# EAGLE board Board (EAGLE 9.6.2)
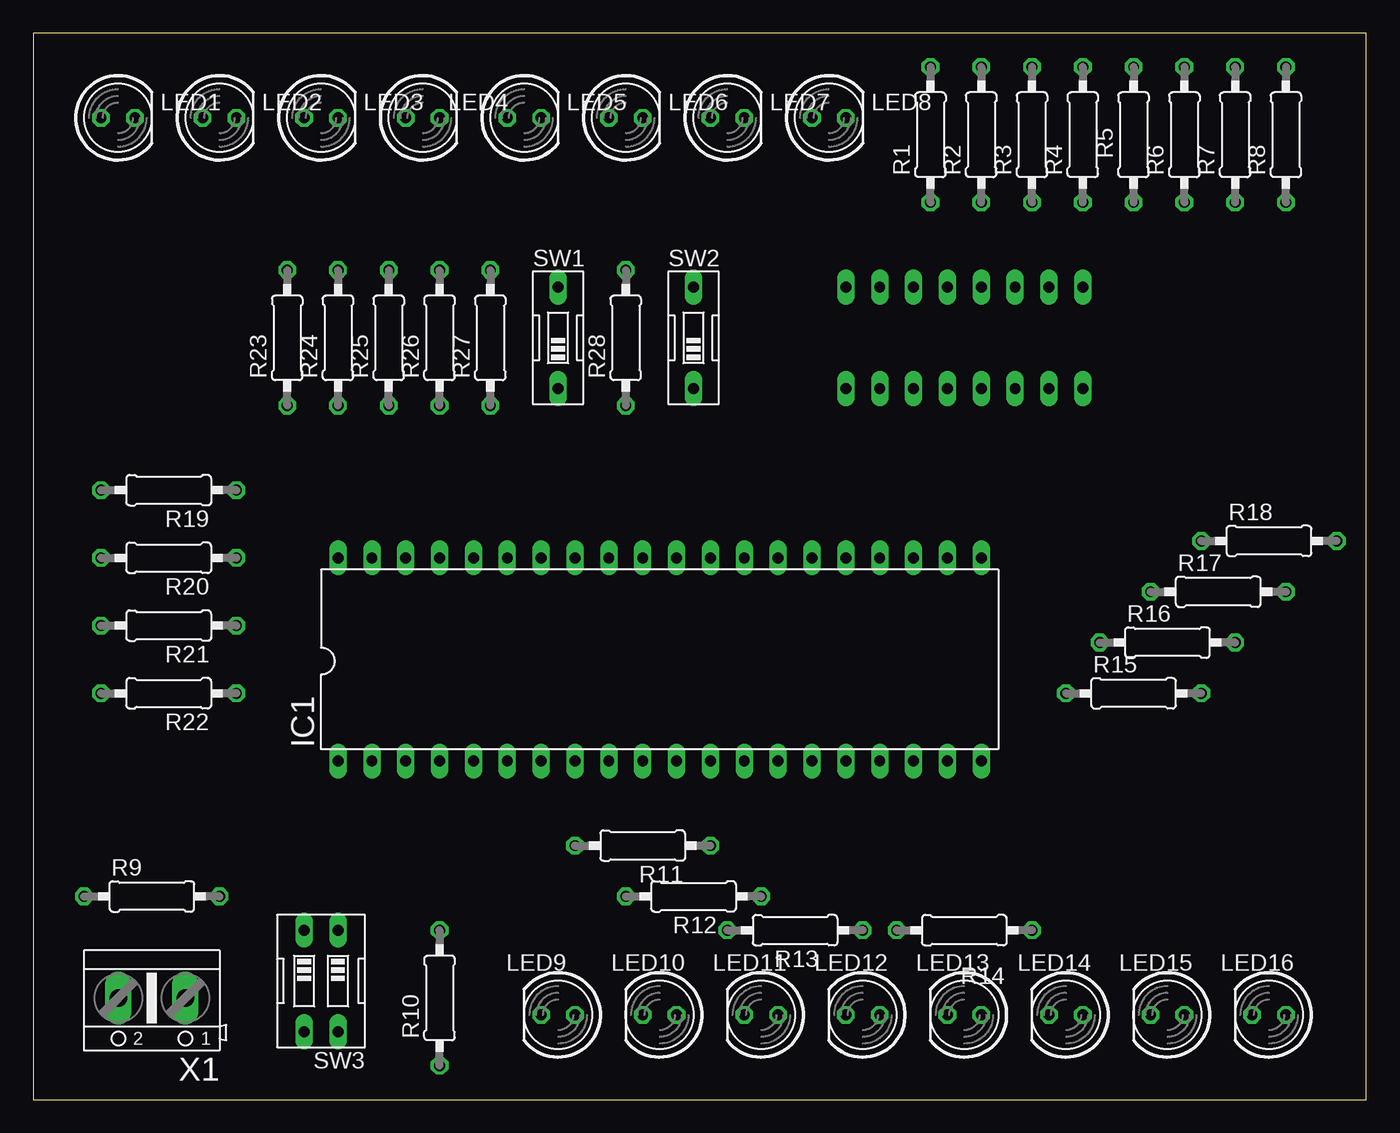
[diagram p0: board, top side]
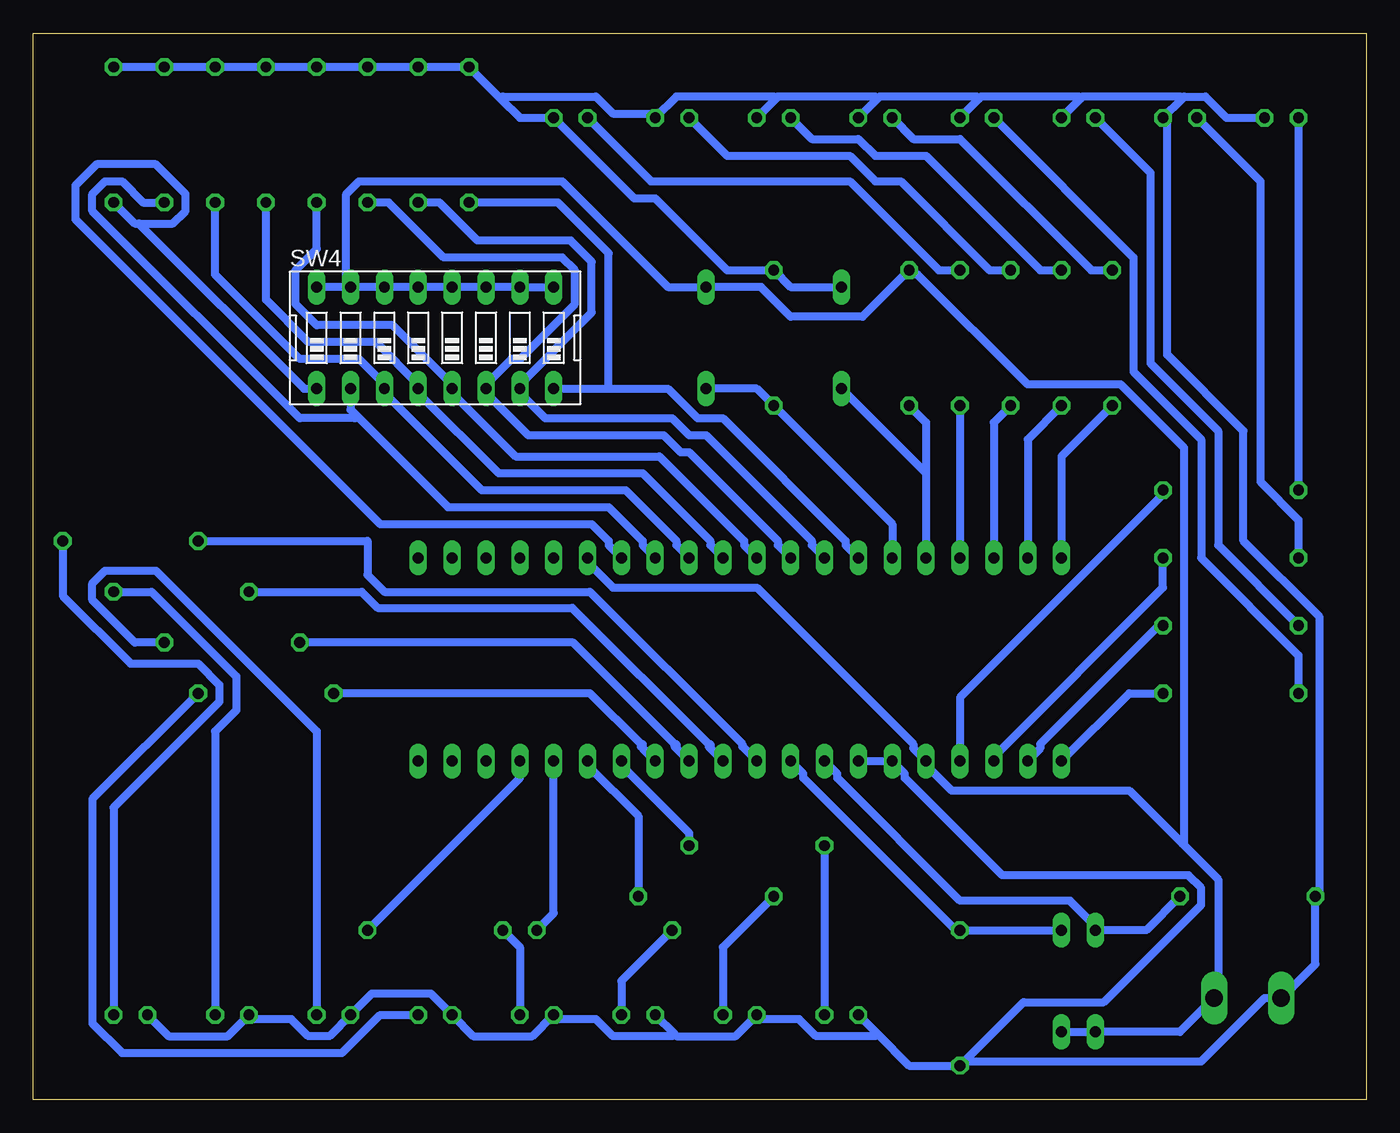
[diagram p1: board, bottom side, seen from below]

Size 100 x 80 mm. Coordinates in mm from the lower left corner, seen from the top.
Outline: 0,0 100,0 100,80 0,80 0,0
Copper layers (1*16): Top 0.035mm / dielectric 1.5mm / Bottom 0.035mm
Design rules "default *": minimum track width 0.6mm, minimum drill 0.35mm, track to track 0.6mm, track to pad 0.5mm, pad to pad 0.5mm, via to via 0.5mm, smd to smd 6mil, copper to edge 40mil, drill to drill 6mil, minimum pad ring 10mil, minimum via ring 8mil, stop-mask expansion 4mil, vias tented up to drill 0mil, thermal gap 10mil

## Footprints (pad centres in the part's own frame; a part is rotated, then mirrored left to right if it is on the bottom)
DIL40 = drill 0.813 long: 1 -24.13,-7.62; 2 -21.59,-7.62; 3 -19.05,-7.62; 4 -16.51,-7.62; 5 -13.97,-7.62; 6 -11.43,-7.62; 7 -8.89,-7.62; 8 -6.35,-7.62; 9 -3.81,-7.62; 10 -1.27,-7.62; 11 1.27,-7.62; 12 3.81,-7.62; 13 6.35,-7.62; 14 8.89,-7.62; 15 11.43,-7.62; 16 13.97,-7.62; 17 16.51,-7.62; 18 19.05,-7.62; 19 21.59,-7.62; 20 24.13,-7.62; 21 24.13,7.62; 22 21.59,7.62; 23 19.05,7.62; 24 16.51,7.62; 25 13.97,7.62; 26 11.43,7.62; 27 8.89,7.62; 28 6.35,7.62; 29 3.81,7.62; 30 1.27,7.62; 31 -1.27,7.62; 32 -3.81,7.62; 33 -6.35,7.62; 34 -8.89,7.62; 35 -11.43,7.62; 36 -13.97,7.62; 37 -16.51,7.62; 38 -19.05,7.62; 39 -21.59,7.62; 40 -24.13,7.62
LED5MM = drill 0.813 octagon: A -1.27,0; K 1.27,0
0207/10 = drill 0.813 octagon: 1 -5.08,0; 2 5.08,0
EDG-01 = drill 0.813 long: 1 0,-3.81; 2 0,3.81
EDG-02 = drill 0.813 long: 1 -1.27,-3.81; 2 1.27,-3.81; 3 1.27,3.81; 4 -1.27,3.81
EDG-08 = drill 0.813 long: 1 -8.89,-3.81; 2 -6.35,-3.81; 3 -3.81,-3.81; 4 -1.27,-3.81; 5 1.27,-3.81; 6 3.81,-3.81; 7 6.35,-3.81; 8 8.89,-3.81; 9 8.89,3.81; 10 6.35,3.81; 11 3.81,3.81; 12 1.27,3.81; 13 -1.27,3.81; 14 -3.81,3.81; 15 -6.35,3.81; 16 -8.89,3.81
AK500/2 = drill 1.321 long: 1 -2.515,0; 2 2.515,0

## Placement (x,y rotation side)
IC1  [DIL40]  46.99,33.02 0 top
LED1  [LED5MM]  6.35,73.66 0 top
LED2  [LED5MM]  13.97,73.66 0 top
LED3  [LED5MM]  21.59,73.66 0 top
LED4  [LED5MM]  29.21,73.66 0 top
LED5  [LED5MM]  36.83,73.66 0 top
LED6  [LED5MM]  44.45,73.66 0 top
LED7  [LED5MM]  52.07,73.66 0 top
LED8  [LED5MM]  59.69,73.66 0 top
LED9  [LED5MM]  39.37,6.35 180 top
LED10  [LED5MM]  46.99,6.35 180 top
LED11  [LED5MM]  54.61,6.35 180 top
LED12  [LED5MM]  62.23,6.35 180 top
LED13  [LED5MM]  69.85,6.35 180 top
LED14  [LED5MM]  77.47,6.35 180 top
LED15  [LED5MM]  85.09,6.35 180 top
LED16  [LED5MM]  92.71,6.35 180 top
R1  [0207/10]  67.31,72.39 90 top
R2  [0207/10]  71.12,72.39 90 top
R3  [0207/10]  74.93,72.39 90 top
R4  [0207/10]  78.74,72.39 90 top
R5  [0207/10]  82.55,72.39 90 top
R6  [0207/10]  86.36,72.39 90 top
R7  [0207/10]  90.17,72.39 90 top
R8  [0207/10]  93.98,72.39 90 top
R9  [0207/10]  8.89,15.24 0 top
R10  [0207/10]  30.48,7.62 90 top
R11  [0207/10]  45.72,19.05 180 top
R12  [0207/10]  49.53,15.24 180 top
R13  [0207/10]  57.15,12.7 180 top
R14  [0207/10]  69.85,12.7 180 top
R15  [0207/10]  82.55,30.48 0 top
R16  [0207/10]  85.09,34.29 0 top
R17  [0207/10]  88.9,38.1 0 top
R18  [0207/10]  92.71,41.91 0 top
R19  [0207/10]  10.16,45.72 180 top
R20  [0207/10]  10.16,40.64 180 top
R21  [0207/10]  10.16,35.56 180 top
R22  [0207/10]  10.16,30.48 180 top
R23  [0207/10]  19.05,57.15 90 top
R24  [0207/10]  22.86,57.15 90 top
R25  [0207/10]  26.67,57.15 90 top
R26  [0207/10]  30.48,57.15 90 top
R27  [0207/10]  34.29,57.15 90 top
R28  [0207/10]  44.45,57.15 90 top
SW1  [EDG-01]  39.37,57.15 0 top
SW2  [EDG-01]  49.53,57.15 0 top
SW3  [EDG-02]  21.59,8.89 180 top
SW4  [EDG-08]  69.85,57.15 0 bottom
X1  [AK500/2]  8.89,7.62 180 top

## Library data of the parts
IC1 = micro-intel; OC_FARNELL: unknown; OC_NEWARK: unknown
LED1-LED16 = led
R1-R28 = rcl; SPICEPREFIX: R
SW1-SW4 = special
X1 = con-ptr500; OC_FARNELL: unknown; OC_NEWARK: unknown

## Nets
GND: IC1.6 IC1.7 LED1.K LED2.K LED3.K LED4.K LED5.K LED6.K LED7.K LED8.K LED9.K LED10.K LED11.K LED12.K LED13.K LED14.K LED15.K LED16.K R1.2 R2.2 R3.2 R4.2 R5.2 R6.2 R7.2 R8.2 R9.1 R10.1 R28.2 SW1.2 X1.2
N$1: IC1.34 R1.1 SW4.8
N$2: IC1.33 R2.1 SW4.7
N$3: IC1.32 R3.1 SW4.6
N$4: IC1.31 R4.1 SW4.5
N$5: IC1.30 R5.1 SW4.4
N$6: IC1.29 R6.1 SW4.3
N$7: IC1.28 R7.1 SW4.2
N$8: IC1.27 R8.1 SW4.1
N$9: IC1.8 R9.2 SW3.2
N$10: IC1.9 R10.2 SW3.1
N$11: IC1.4 R19.1
N$12: LED1.A R19.2
N$13: LED2.A R20.2
N$14: LED3.A R21.2
N$15: LED4.A R22.2
N$16: LED5.A R23.2
N$17: LED6.A R24.2
N$18: LED7.A R25.2
N$19: LED8.A R26.2
N$20: IC1.37 R26.1
N$21: IC1.38 R25.1
N$22: IC1.39 R24.1
N$23: IC1.40 R23.1
N$24: IC1.1 R22.1
N$25: IC1.2 R21.1
N$26: IC1.3 R20.1
N$27: IC1.14 R11.1
N$28: IC1.15 R12.1
N$29: IC1.16 R13.1
N$30: IC1.17 R14.1
N$31: IC1.13 R15.1
N$32: IC1.12 R16.1
N$33: IC1.11 R17.1
N$34: IC1.10 R18.1
N$35: LED16.A R18.2
N$36: LED15.A R17.2
N$37: LED14.A R16.2
N$38: LED13.A R15.2
N$39: LED12.A R14.2
N$40: LED11.A R13.2
N$41: LED10.A R12.2
N$42: LED9.A R11.2
N$44: IC1.35 R28.1 SW2.1
N$45: IC1.36 R27.1 SW1.1
VCC: IC1.5 IC1.26 R27.2 SW2.2 SW3.3 SW3.4 SW4.9 SW4.10 SW4.11 SW4.12 SW4.13 SW4.14 SW4.15 SW4.16 X1.1

## Tracks (layer width: path | path; a pad name or v marks a point on that pad's centre or on a via)
GND
  Bottom 0.6: LED1.K 10.48,73.66 12.06,75.25 13.65,75.25 13.81,75.09 | 13.81,75.09 LED2.K 14.92,73.66 14.92,55.88 9.21,50.16 9.21,41.91 3.49,36.2 3.49,15.56 R9.1 3.81,10.16 6.35,7.62 X1.2 7.62,7.62 12.38,2.86 29.84,2.86 30,3.02 | 21.43,75.09 21.27,75.25 13.97,75.25 13.81,75.09 | 21.43,75.09 LED3.K | 29.05,75.09 28.89,75.25 21.59,75.25 21.43,75.09 | 29.05,75.09 LED4.K | 36.67,75.09 36.51,75.25 29.21,75.25 29.05,75.09 | 36.67,75.09 LED5.K | 44.29,75.09 44.13,75.25 36.83,75.25 36.67,75.09 | 44.29,75.09 LED6.K | 44.29,75.09 44.45,75.25 51.75,75.25 LED7.K 53.34,73.98 56.52,73.98 57.78,75.25 64.77,75.25 64.93,75.09 | SW1.2 43.18,60.96 R28.2 47.94,62.23 53.34,67.63 54.93,67.63 LED8.K 63.5,73.66 64.93,75.09 | 64.93,75.09 R1.2 R2.2 R3.2 R4.2 R5.2 R6.2 R7.2 R8.2 | LED16.K 89.85,4.76 85.41,4.76 LED15.K 83.82,6.03 80.64,6.03 79.38,4.76 77.79,4.76 LED14.K 74.61,7.94 70.17,7.94 LED13.K 66.99,4.76 62.55,4.76 LED12.K 60.96,6.03 57.78,6.03 56.52,4.76 52.07,4.76 51.91,4.92 | LED11.K 51.91,4.92 | 51.91,4.92 51.75,4.76 47.31,4.76 LED10.K 45.72,6.03 42.55,6.03 41.27,4.76 36.83,4.76 36.67,4.92 | IC1.7 IC1.6 34.61,24.45 34.61,24.13 27.3,16.83 13.34,16.83 12.38,15.88 12.38,14.61 19.68,7.3 25.72,7.3 30,3.02 | LED9.K 36.67,4.92 | 36.67,4.92 34.29,2.54 R10.1 30,3.02
N$1
  Bottom 0.6: IC1.34 39.05,41.59 39.05,41.91 48.26,51.12 50.16,51.12 52.39,53.34 56.83,53.34 | SW4.8 56.83,53.34 | R1.1 60.64,67.31 56.83,63.5 56.83,53.34
N$2
  Bottom 0.6: IC1.33 41.59,41.59 41.59,41.91 49.53,49.85 50.8,49.85 52.07,51.12 61.59,51.12 63.5,53.02 SW4.7 63.5,53.66 58.1,59.05 58.1,62.87 59.69,64.45 66.67,64.45 69.53,67.31 R2.1
N$3
  Bottom 0.6: IC1.32 44.13,41.59 44.13,41.91 50.8,48.58 51.44,48.58 52.7,49.85 62.87,49.85 66.04,53.02 SW4.6 66.04,53.66 64.14,55.56 63.5,55.56 59.37,59.69 59.37,62.23 60.33,63.18 69.22,63.18 73.34,67.31 R3.1
N$4
  Bottom 0.6: IC1.31 46.67,41.59 46.67,41.91 53.02,48.26 63.82,48.26 68.58,53.02 SW4.5 68.58,53.66 73.03,58.1 78.74,58.1 80.33,59.69 80.33,62.23 78.74,63.82 R4.1
N$5
  Bottom 0.6: IC1.30 49.21,41.59 49.21,41.91 54.29,46.99 65.09,46.99 71.12,53.02 SW4.4 71.12,53.66 74.3,56.83 79.38,56.83 82.55,60.01 R5.1
N$6
  Bottom 0.6: IC1.29 51.75,41.59 51.75,41.91 55.56,45.72 66.36,45.72 73.66,53.02 SW4.3 73.66,53.66 75.56,55.56 80.01,55.56 86.36,61.91 R6.1
N$7
  Bottom 0.6: IC1.28 54.29,41.59 54.29,41.91 56.83,44.45 68.9,44.45 75.72,51.28 | 75.72,51.28 76.2,51.75 SW4.2 | R7.1 91.76,67.31 93.34,68.9 94.61,68.9 95.57,67.94 95.57,66.67 80.01,51.12 75.88,51.12 75.72,51.28
N$8
  Bottom 0.6: IC1.27 56.83,41.59 56.83,41.91 58.1,43.18 73.98,43.18 96.84,66.04 96.84,68.58 95.25,70.17 90.81,70.17 88.58,67.94 88.58,66.67 89.53,65.72 92.08,65.72 | 92.08,65.72 92.39,65.72 R8.1 | SW4.1 79.69,53.34 92.08,65.72
N$9
  Bottom 0.6: 20,12.7 16.51,12.7 R9.2 | IC1.8 39.69,24.45 39.69,24.13 30.48,14.92 22.23,14.92 20,12.7 | 20,12.7 SW3.2
N$10
  Bottom 0.6: SW3.1 R10.2 30.8,12.7 42.23,24.13 42.23,24.45 IC1.9
N$11
  Bottom 0.6: IC1.4 30.48,30.16 15.24,45.4 R19.1
N$12
  Bottom 0.6: LED1.A R19.2
N$13
  Bottom 0.6: R20.2 5.08,43.5 7.94,46.35 7.94,68.9 LED2.A
N$14
  Bottom 0.6: R21.2 11.11,41.59 11.11,50.16 16.19,55.24 16.19,69.53 LED3.A
N$15
  Bottom 0.6: R22.2 5.08,33.34 12.38,40.64 12.38,49.53 17.46,54.61 17.46,63.18 LED4.A
N$16
  Bottom 0.6: R23.2 20.64,62.23 30.48,72.07 33.97,72.07 LED5.A
N$17
  Bottom 0.6: R24.2 24.45,62.23 33.02,70.8 36.83,70.8 38.1,72.07 41.59,72.07 LED6.A
N$18
  Bottom 0.6: R25.2 28.26,62.23 34.92,68.9 36.83,68.9 38.73,70.8 47.94,70.8 LED7.A
N$19
  Bottom 0.6: R26.2 32.07,62.23 38.73,68.9 53.66,68.9 LED8.A
N$20
  Bottom 0.6: R26.1 IC1.37
N$21
  Bottom 0.6: IC1.38 27.94,50.8 R25.1
N$22
  Bottom 0.6: IC1.39 25.4,49.53 R24.1
N$23
  Bottom 0.6: IC1.40 22.86,48.26 R23.1
N$24
  Bottom 0.6: R22.1 17.78,30.48 IC1.1
N$25
  Bottom 0.6: IC1.2 24.45,26.35 24.45,26.67 15.56,35.56 R21.1
N$26
  Bottom 0.6: R20.1 15.24,38.42 27.94,25.72 IC1.3
N$27
  Bottom 0.6: R11.1 50.8,20 55.88,25.08 IC1.14
N$28
  Bottom 0.6: R12.1 54.61,21.27 58.42,25.08 IC1.15
N$29
  Bottom 0.6: IC1.16 60.96,13.97 R13.1
N$30
  Bottom 0.6: IC1.17 63.5,24.13 R14.1
N$31
  Bottom 0.6: 54.29,26.67 54.29,26.35 IC1.13 54.42,26.48 54.42,26.66 58.23,30.48 R15.1
N$32
  Bottom 0.6: 51.75,26.67 51.75,26.35 IC1.12 51.88,26.48 51.88,26.66 59.5,34.29 R16.1
N$33
  Bottom 0.6: 49.21,26.67 49.21,26.35 IC1.11 49.34,26.48 49.34,26.66 59.57,36.9 74.16,36.9 75.36,38.1 R17.1
N$34
  Bottom 0.6: R18.1 74.93,41.91 74.93,39.37 73.66,38.1 58.23,38.1 46.8,26.66 46.8,26.48 IC1.10
N$35
  Bottom 0.6: LED16.A 93.98,21.91 86.04,29.84 86.04,31.11 87.63,32.7 92.71,32.7 97.79,37.78 R18.2
N$36
  Bottom 0.6: LED15.A 86.36,27.62 84.77,29.21 84.77,31.75 91.12,38.1 R17.2
N$37
  Bottom 0.6: LED14.A 78.74,27.62 90.81,39.69 94.61,39.69 95.57,38.73 95.57,37.47 92.39,34.29 R16.2
N$38
  Bottom 0.6: LED13.A 73.98,6.35 76.83,3.49 93.34,3.49 95.57,5.71 95.57,22.54 R15.2
N$39
  Bottom 0.6: LED12.A 63.5,11.43 R14.2
N$40
  Bottom 0.6: LED11.A 55.88,8.89 R13.2
N$41
  Bottom 0.6: LED10.A 48.26,11.43 R12.2
N$42
  Bottom 0.6: R11.2 LED9.A
N$44
  Bottom 0.6: IC1.35 35.56,43.18 R28.1 45.72,53.34 SW2.1
N$45
  Bottom 0.6: 33.02,46.99 33.02,50.8 R27.1 | 33.02,46.99 IC1.36 | 33.02,46.99 SW1.1
VCC
  Bottom 0.6: SW4.9 SW4.10 SW4.11 SW4.12 SW4.13 SW4.14 SW4.15 76.52,60.96 | 76.52,60.96 SW4.16 | 76.52,60.96 76.52,67.94 75.56,68.9 60.33,68.9 52.39,60.96 SW2.2 45.4,60.96 43.18,58.74 37.78,58.74 R27.2 34.29,61.91 33.66,61.91 25.4,53.66 18.41,53.66 13.65,48.9 13.65,19.37 13.81,19.21 | SW3.4 SW3.3 13.97,5.08 11.43,7.62 X1.1 11.11,7.62 11.11,16.51 13.81,19.21 | IC1.26 58.42,40.32 56.52,38.42 45.72,38.42 33.97,26.67 33.97,26.35 IC1.5 33.34,25.4 31.11,23.18 17.78,23.18 13.81,19.21